# Altium PCB WalkMod B0.PcbDoc
Units mm, origin at the board's own origin, x right, y up, seen from the top; angles counter-clockwise.
Board outline 19.6 x 15.5 mm, 2 copper layers (Top Layer, Bottom Layer), stack 0.67 mm thick; 27 components, 25 nets, 90 pads, 39 vias.
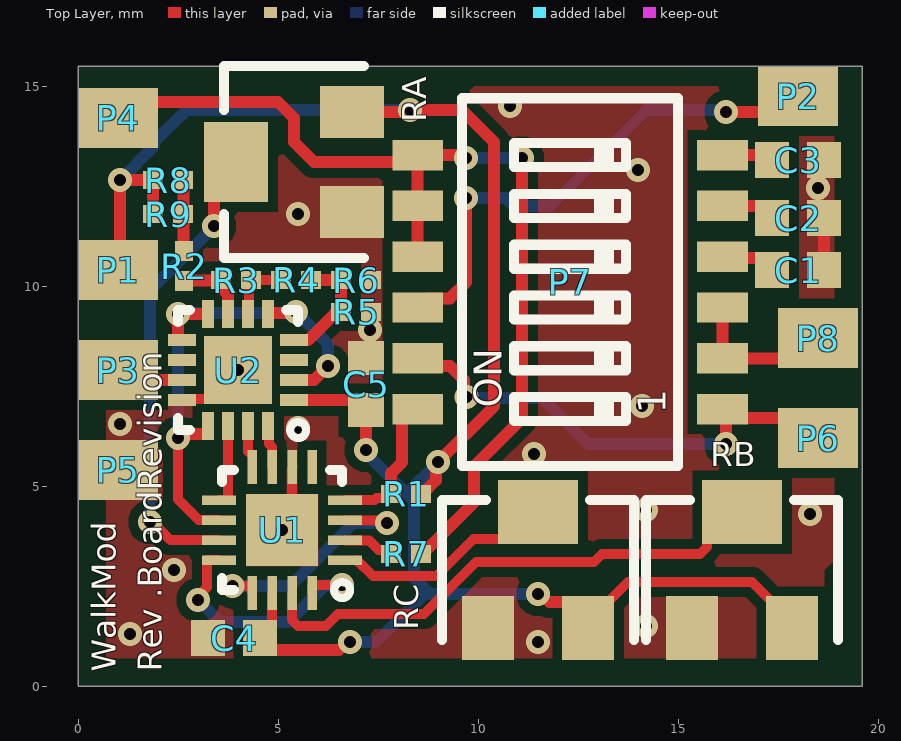
[diagram p0: Top Layer view]
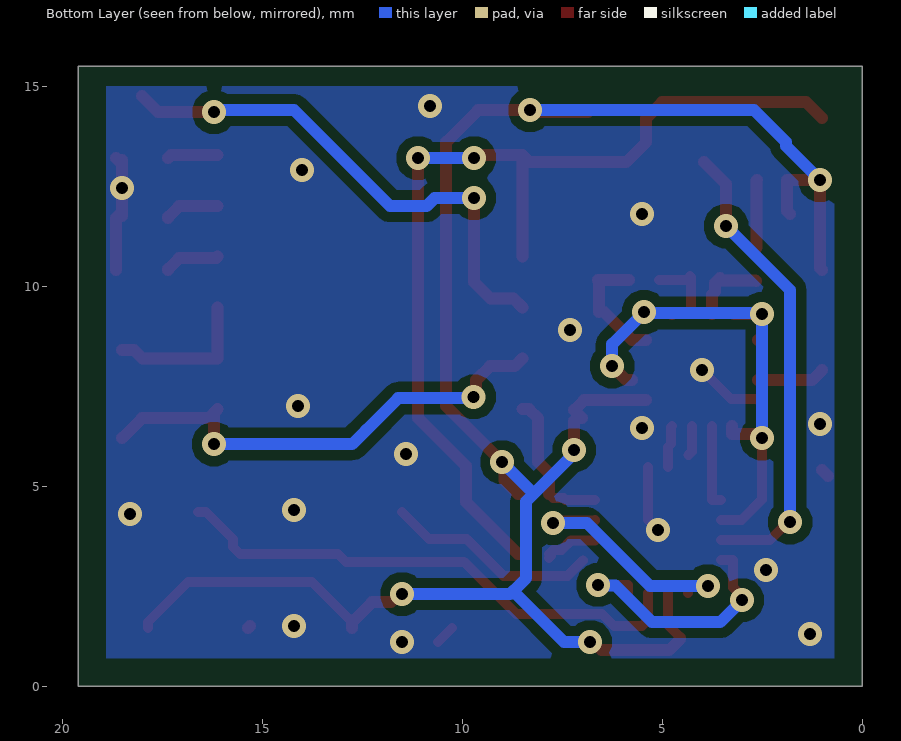
[diagram p1: Bottom Layer view, seen from below]

## Layer stack, top to bottom
Top Solder: solder mask 0.0254, SM-001, Dk 4
Top Layer: signal copper 0.035
Dielectric 1: core 0.6, Core-038, Dk 4.6
Bottom Layer: signal copper 0.035
Bottom Solder: solder mask 0.0254, SM-001, Dk 4

## Board outline
0,0 0,15.5 19.6,15.5 19.6,0

## Design rules (kind name [scope] priority, off if disabled: settings)
BoardOutlineClearance [All] p1 off: gap=0.7 ignorepadtopadclearanceinfootprint=FALSE
Clearance Polygon_Clearance [InPolygon] p1: gap=0.25 ignorepadtopadclearanceinfootprint=FALSE
Clearance QFN16_Clearance [IsPad and HasFootprint('QFN16_0.5_C') vs IsPad and HasFootprint('QFN16_0.5_C')] p2: gap=0.152 ignorepadtopadclearanceinfootprint=FALSE
Clearance [All] p3: gap=0.2 ignorepadtopadclearanceinfootprint=FALSE
Height [All] p1 off: minheight=0 maxheight=25.4 prefheight=12.7
HoleSize [All] p1: absolutevalues=TRUE maxlimit=0.3 minlimit=0.3 maxpercent=80.000 minpercent=20.000
HoleToHoleClearance [All] p1: gap=0.5 allowstackedmicrovias=TRUE
MinimumSolderMaskSliver [All] p1: minsoldermaskwidth=0.08
PolygonConnect [All] p1: connectstyle=Direct reliefconductorwidth=0.254 reliefentries=4 polygonreliefangle="90 Angle" airgapwidth=0.254
RoomDefinition "WalkMod B0" [InComponentClass('WalkMod B0')] p1 off: confinementstyle=ConfineIn formatcopy=TRUE lockcomponents=FALSE outline 0,0 19.6,0 19.6,15.5 0,15.5
RoutingVias [All] p1: holewidth=0.3 width=0.6 viastyle="Through Hole" minholewidth=0.3 minwidth=0.6 maxholewidth=0.3 maxwidth=0.6
SilkToSolderMaskClearance [IsPad] p1 off: minsilkscreentomaskgap=0.254 clearancetoexposedcopper=TRUE
SolderMaskExpansion [All] p1: expansion=0.055 istentingtop=FALSE
Width [All] p1: maxlimit=0.7 minlimit=0.25 preferedwidth=0.3
25 further rules are at their usual default settings.

## Components (designator, comment, footprint, x,y, rotation, side; value= is the part's Value field where it differs from the comment)
C1 "CL10B105KA8NFNC" CX7R0603K#1 18,10.4 r180 top value=1uF
C2 "CL10B474KO8NFNC" CX7R0603K#1 18,11.7 r180 top value=470nF
C3 "CC0603KRX7R6BB224" CX7R0603K#1 18,13.15 r180 top value=220nF
C4 "CL10B105KA8NFNC" CX7R0603K#2 3.9,1.2 r0 top value=1uF
C5 "CL10B105KA8NFNC" CX7R0603K#2 7.2,7.55 r270 top value=1uF
P1 "SMD Pad 1 pin" PAD_2X1.5_SQUARE 1,10.4 r0 top
P2 "SMD Pad 1 pin" PAD_2X1.5_SQUARE 18,14.75 r180 top
P3 "SMD Pad 1 pin" PAD_2X1.5_SQUARE 1,7.9 r0 top
P4 "SMD Pad 1 pin" PAD_2X1.5_SQUARE 1,14.2 r0 top
P5 "SMD Pad 1 pin" PAD_2X1.5_SQUARE 1,5.4 r180 top
P6 "SMD Pad 1 pin" PAD_2X1.5_SQUARE 18.5,6.2 r0 top
P7 "DS05-127-2-06BK-SMT-TR" CUI-DS05-127-2-06BK-SMT_C 12.3,10.1 r90 top
P8 "SMD Pad 1 pin" PAD_2X1.5_SQUARE 18.5,8.7 r0 top
R1 "DNP" AT0402_C 8.2,4.8 r180 top
R2 "RG1005P-472-B-T5" RT0402_C 2.65,10.5 r90 top value=4.7k
R3 "RG1005P-472-B-T5" RT0402_C 3.95,10.15 r180 top value=4.7k
R4 "RG1005P-472-B-T5" RT0402_C 5.45,10.15 r180 top value=4.7k
R5 "RG1005P-472-B-T5" RT0402_C 6.95,9.35 r180 top value=4.7k
R6 "RG1005P-472-B-T5" RT0402_C 6.95,10.15 r180 top value=4.7k
R7 "RG1005P-472-B-T5" RT0402_C 8.2,3.3 r180 top value=4.7k
R8 "RG1005P-472-B-T5" RT0402_C 2.25,12.65 r180 top value=4.7k
R9 "RG1005P-472-B-T5" RT0402_C 2.25,11.8 r180 top value=4.7k
RA "3214W-1-103E" BOURNS_3214W_C 5.4,13.1 r0 top value=10k
RB "3214W-1-103E" BOURNS_3214W_C 16.6,2.9 r270 top value=10k
RC "3214W-1-103E" BOURNS_3214W_C 11.5,2.9 r270 top value=10k
U1 "NX3L4053HR,115" HXQFN16_SOT1039-2_C 5.1,3.9 r180 top
U2 "LM339QT" QFN16_0.5_C 4,7.9 r180 top

## Footprints (in the part's own frame and the unit in brackets; to place one, negate y for a bottom-side part, rotate by r counter-clockwise, add the part's x,y. Pads: shape width x height; smd on the part's side, far side on the other; paste and mask are expansions set on the pad)
AT0402_C [mm] "Chip Resistor, 2-Leads, Body 1.00x0.50mm, IPC High Density"
  rect 0.5x0.45 smd: 1(-0.375,0) 2(0.375,0)
  body extent -0.53,-0.27 0.53,0.28, height 0.4
BOURNS_3214W_C [mm]
  rect 1.6x1.3 smd: 1(1.45,-1.25) 3(1.45,1.25)
  rect 1.6x2 smd: 2(-1.45,0)
  silkscreen extent -1.75,-2.4 1.75,2.4, body extent -1.98,-2.41 1.98,2.42, height 5.29
CUI-DS05-127-2-06BK-SMT_C [mm] "Dip Switch SPST 6 Position Surface Mount Slide (Standard) Actuator 25mA 24VDC"
  rect 0.76x1.27 smd: 1(-3.175,-3.81) 2(-3.175,3.81) 3(-1.905,-3.81) 4(-1.905,3.81) 6(-0.635,3.81) 8(0.635,3.81) 10(1.905,3.81) 12(3.175,3.81)
  rect 0.76x1.27 smd mask+0.102: 5(-0.635,-3.81) 7(0.635,-3.81) 9(1.905,-3.81) 11(3.175,-3.81)
  silkscreen extent -4.59,-2.7 4.59,2.7, body extent -4.59,-4.15 4.59,4.15, height 2.4
CX7R0603K#1 [mm] "Chip Capacitor, 2-Leads, Body 1.60x0.81mm, IPC High Density"
  rect 0.85x0.9 smd: 1(-0.65,0)
  rect 0.85x0.9 smd mask+0.102: 2(0.65,0)
  body extent -0.88,-0.48 0.87,0.48, height 1.02
CX7R0603K#2 [mm] "Chip Capacitor, 2-Leads, Body 1.60x0.81mm, IPC High Density"
  rect 0.85x0.9 smd: 1(-0.65,0) 2(0.65,0)
  body extent -0.88,-0.48 0.87,0.48, height 1.02
HXQFN16_SOT1039-2_C [mm] "HXQFN16 (U) plastic thermal enhanced extremely thin quad  flat package; no leads; 16 terminals, 0.5 mm pitch, 3 mm x 3  mm x 0.5 mm body"
  rect 0.85x0.24 smd paste-0.012: 1(-1.575,0.75) 2(-1.575,0.25) 3(-1.575,-0.25) 4(-1.575,-0.75) 9(1.575,-0.75) 10(1.575,-0.25) 11(1.575,0.25) 12(1.575,0.75)
  rect 0.24x0.85 smd paste-0.012: 5(-0.75,-1.575) 6(-0.25,-1.575) 7(0.25,-1.575) 8(0.75,-1.575) 13(0.75,1.575) 14(0.25,1.575) 15(-0.25,1.575) 16(-0.75,1.575)
  rect 1.8x1.8 smd paste-0.5: EP(0,0)
  silkscreen extent -1.7,-1.5 1.5,1.7, body extent -1.5,-1.5 1.5,1.5, height 0.5
PAD_2X1.5_SQUARE [mm]
  rect 2x1.5 smd paste-5: 1(0,0)
QFN16_0.5_C [mm]
  rect 0.7x0.3 smd: 1(-1.4,0.75) 2(-1.4,0.25) 3(-1.4,-0.25) 4(-1.4,-0.75) 9(1.4,-0.75) 10(1.4,-0.25) 11(1.4,0.25) 12(1.4,0.75)
  rect 0.3x0.7 smd: 5(-0.75,-1.4) 6(-0.25,-1.4) 7(0.25,-1.4) 8(0.75,-1.4) 13(0.75,1.4) 14(0.25,1.4) 15(-0.25,1.4) 16(-0.75,1.4)
  rect 1.7x1.7 smd: EP(0,0)
  silkscreen extent -1.7,-1.5 1.5,1.7, body extent -1.5,-1.5 1.5,1.5, height 1
RT0402_C [mm] "Chip Resistor, 2-Leads, Body 1.00x0.50mm, IPC High Density"
  rect 0.5x0.45 smd: 1(-0.375,0) 2(0.375,0)
  body extent -0.53,-0.27 0.53,0.28, height 0.4

## Part data
C1 C4 C5: library part kyocera-C-X7R-0603, "1 µF ±10% 25V Ceramic Capacitor X7R 0603 (1608 Metric)", Value2=25V, Size=0603, Type=CL10B105KA8NFNC
C2: library part kyocera-C-X7R-0603, "0.47 µF ±10% 16V Ceramic Capacitor X7R 0603 (1608 Metric)", Value2=16V, Size=0603, Type=CL10B474KO8NFNC
C3: library part kyocera-C-X7R-0603, "0.22 µF ±10% 10V Ceramic Capacitor X7R 0603 (1608 Metric)", Value2=10V, Size=0603, Type=CC0603KRX7R6BB224
P1 P2 P3 P4 P5 P6 P8: "Single SMD Pad"
  P1: Name=3.3V
  P2: Name="Replacement Button"
  P3: Name="Axis In"
  P4: Name="Axis Out"
  P5: Name=GND
  P6: Name="Button In"
  P8: Name="Button Out"
P7: "Dip Switch SPST 6 Position Surface Mount Slide (Standard) Actuator 25mA 24VDC", Type=DS05-127-2-06BK-SMT-TR
R1: library part AT0402FRE0710KL, "10 kOhms ±1% 0.063W, 1/16W Chip Resistor 0402 (1005 Metric) Anti-Sulfur, Automotive AEC-Q200, Moisture Resistant Thin Film", Value2=62.5mW, Type=DNP
R2 R3 R4 R5 R6 R7 R8 R9: library part RT0402DRD0747KL, "4.7 kOhms ±0.1% 0.063W, 1/16W Chip Resistor 0402 (1005 Metric) Anti-Sulfur, Automotive AEC-Q200 Thin Film", Value2=62.5mW, Type=RG1005P-472-B-T5
RA RB RC: "10 kOhms 0.25W, 1/4W J Lead Surface Mount Trimmer Potentiometer Cermet 5.0 Turn Top Adjustment", Value2=250mW, Type=3214W-1-103E
U1: library part NX3L4053, "3 Circuit IC Switch 2:1 800mOhm 16-HXQFN (3x3)", Manufacturer Part Number 1="NXP USA Inc.", Manufacturer 1=NX3L4053HR,115, Type=NX3L4053HR,115
U2: "Comparator General Purpose CMOS, DTL, ECL, MOS, Open-Collector, TTL 16-QFN (3x3)", Manufacturer 1=STMicroelectronics, Manufacturer Part Number 1=LM339QT, Type=LM339QT

## Via types
v1: diameter 0.6, hole 0.3, Top Layer to Bottom Layer, 39 vias

## Nets (pads, with @x,y where several pads share a name; then routed paths per layer and width w, separated by ;. In a path a pad name is that pad's centre, name@x,y a point inside that pad or via, vN(x,y) a via of type N, cw(c..) or ccw(c..) an arc to the next point about the centre after c; other vN are vias at no path point)
1S: U1.9 U2.14 | length 2.1
  Top Layer w0.25: U1.9 3.53,4.655 3.75,4.655 U2.14
2S: U1.8 U2.15 | length 0.8
  Top Layer w0.25: U2.15 4.25,5.87 U1.8@4.345,5.775
3S: U1.7 U2.16 | length 1.1
  Top Layer w0.25: U2.16 4.775,6.475 4.775,6.052 4.85,5.977 U1.7
+3.3V: C4.2 C5.2 P1.1 R1.1 R8.2 R9.2 RA.3 RB.3 RC.3 U1.14 U2.1 | length 50
  Top Layer w0.25: C4.2 4.55,1.225 4.85,1.525 U1.14 ; RC.3@12.75,1.6 13.75,2.6 16.85,2.6 17.85,1.6 RB.3
  Top Layer w0.3: P1.1 1.05,10.45 v1(1.05,12.65) ; v1@1.05,12.7 v1(1.05,12.65) ; R9.2@1.8,11.8 1.875,11.875 R8.2 v1(1.05,12.65) ; C4.2 4.55,1.175 4.825,0.9 6.519,0.9 ; U2.1 6.95,7.15 C5.2 7,6.7 7.125,6.7 7.2,6.625 v1(7.2,5.9) ; RA.3 8.25,14.35 v1(8.3,14.4) 9.6,14.4 10.4,13.6 10.4,7 8.943,5.543 8.943,5.143 8.6,4.8 R1.1 ; 11.781,2.1 12.25,2.1 12.75,1.6 RC.3
  Bottom Layer w0.3: v1(1.05,12.65) 1.904,13.504 1.904,13.604 2.7,14.4 v1(8.3,14.4) ; v1(6.8,1.1) 7.45,1.1 8.725,2.375 ; v1(7.2,5.9) 7.2,5.819 8.4,4.619 8.4,2.7 8.725,2.375 ; 8.209,4.809 v1(9,5.6) ; v1(11.5,2.3) 8.8,2.3 8.725,2.375
A: RA.2 U1.11 | length 11.8
  Top Layer w0.25: v1(1.8,4.1) 1.855,4.1 2.305,3.65 U1.11
  Top Layer w0.3: v1(3.4,11.5) 3.4,12.55 RA.2
  Bottom Layer w0.3: v1(1.8,4.1) 1.8,9.9 v1(3.4,11.5)
A\C\T\I\V\A\T\E\: P7.2 R1.2 U1.4 | length 3.7
  Top Layer w0.25: U1.4 7.416,4.65 7.466,4.7 7.725,4.7 R1.2
  Top Layer w0.3: R1.2 7.825,5.325 8.1,5.6 8.1,6.695 8.33,6.925 P7.2
ALT_BTN: P2.1 P7.6 | length 13.1
  Top Layer w0.3: P7.6 8.72,9.695 9.295,9.695 9.7,10.1 v1(9.7,12.2) ; v1(16.2,14.35) 17.6,14.35 P2.1
  Bottom Layer w0.3: v1(9.7,12.2) 10.691,12.2 10.891,12 11.8,12 14.2,14.4 v1@16.2,14.4
B: RB.2 U1.15 | length 13.3
  Top Layer w0.25: U1.15 5.35,1.65 5.5,1.5 6.2,1.5 6.5,1.8 8.646,1.8 9.946,3.1 12.9,3.1 13.1,3.3 15.55,3.3 15.725,3.475 15.725,3.675 16.4,4.35 RB.2
BTN_IN: P6.1 P7.1 P7.4 | length 12.3
  Top Layer w0.3: P7.4 8.685,8 9.3,8 9.653,7.647 9.653,7.347 v1@9.7,7.3 ; v1@9.67,7.27 v1(9.71,7.23) ; P7.1 P7.1@16.2,6.835 ; v1(16.2,6.05) P7.1@16.2,6.835 ; P6.1 18,6.7 16.335,6.7 P7.1@16.2,6.835
  Bottom Layer w0.3: v1(9.71,7.23) 9.74,7.2 11.6,7.2 12.4,6.4 12.75,6.05 v1(16.2,6.05)
BTN_OUT: P7.3 P7.5 P8.1 | length 3.7
  Top Layer w0.3: P7.5 P7.3 17.995,8.195 18.2,8.4 P8.1@18.5,8.4
C: RC.2 U1.1 | length 5.4
  Top Layer w0.25: U1.1@6.975,3.145 7.37,2.75 8.96,2.75 9.885,3.675 10.825,3.675 RC.2
GND: C1.1 C2.1 C3.1 C4.1 C5.1 P5.1 R5.1 R6.1 RA.1 RB.1 RC.1 U1.6 U1.EP U2.12 U2.EP | length 7
  Top Layer w0.25: U2.12 2.625,7.175 2.965,7.175 3.275,7.175 v1(4,7.9) ; v1(5.1,3.9) 5.35,4.15 U1.6 U1.6@5.355,5.48 ; RC.1 RC.1@10.6,1.1
  Top Layer w0.3: P5.1@0.85,5.25 P5.1 ; RB.1@15.3,1.5 RB.1 ; C2.1@18.5,11.75 v1(18.5,12.45) C3.1@18.5,13.15 ; C2.1@18.6,11.75 C2.1 C1.1 ; C3.1@18.6,13.15 C3.1@18.65,13.2
  other v1: 11.5,1.1 1.3,1.3 14.2,1.5 2.4,2.9 18.3,4.3 14.2,4.4 11.4,5.8 5.5,6.45 1.05,6.55 14.1,7 7.3,8.9 5.5,11.8 14,12.9 10.8,14.5
IN: P3.1 U2.11 | length 1.7
  Top Layer w0.3: P3.1 1.25,7.65 U2.11
IN_BUF: U1.10 U2.2 U2.5 U2.8 U2.9 U2.13 | length 14.3
  Top Layer w0.25: v1(2.5,6.2) 2.5,4.67 3.015,4.155 3.52,4.155 U1.10
  Top Layer w0.3: v1(2.5,6.2) 2.581,6.2 2.681,6.3 3.25,6.3 U2.13 ; U2.9 2.5,8.65 v1(2.5,9.3) U2.8@3.2,9.3 ; U2.5 4.75,9.325 5.425,9.325 v1(5.45,9.35) ; U2.2@5.75,7.65 5.895,7.65 6.245,8 v1(6.25,8)
  Bottom Layer w0.3: v1(2.5,6.2) v1(2.5,9.3) 2.525,9.325 5.375,9.325 v1@5.4,9.35 ; v1(5.45,9.35) 6.25,8.55 v1(6.25,8)
NetC1_2: C1.2 P7.7 | length 1.4
  Top Layer w0.3: P7.7 16.145,10.7 17.075,10.7 17.35,10.425 C1.2
NetC2_2: C2.2 P7.9 | length 1.4
  Top Layer w0.3: P7.9 16.115,12 17.075,12 17.35,11.725 C2.2
NetC3_2: C3.2 P7.11 | length 1.3
  Top Layer w0.3: P7.11 17.275,13.275 C3.2@17.35,13.2
NetR2_2: R2.2 R8.1 R9.1 | length 1.8
  Top Layer w0.3: R8.1 2.638,12.638 2.638,10.963 R2.2@2.7,10.9
NetU1_3: U1.3 U1.13 | length 6.3
  Top Layer w0.25: v1(3.855,2.5) 4.345,2.5 4.35,2.495 U1.13 ; U1.3 6.68,4.145 7.335,4.145 7.338,4.142 7.658,4.142 v1(7.725,4.075)
  Bottom Layer w0.3: v1(3.855,2.5) 5.3,2.5 6.875,4.075 v1(7.725,4.075)
NetU1_12: U1.12 U1.16 | length 6.6
  Top Layer w0.25: v1(3,2.15) 3,2.245 3.225,2.47 3.225,3.145 3.23,3.15 U1.12 ; U1.16 5.85,2.523 5.855,2.528 v1(6.602,2.528)
  Bottom Layer w0.3: v1(3,2.15) 3.55,1.6 5.25,1.6 6.16,2.51 6.583,2.51 v1(6.602,2.528)
OUT: R7.2 U1.2 | length 1.4
  Top Layer w0.25: U1.2 6.68,3.645 7.271,3.645 7.516,3.4 7.725,3.4 R7.2 ; R7.2@7.775,3.25 R7.2@7.825,3.2
OUT_FLT: P4.1 P7.8 P7.10 P7.12 R7.1 | length 24.8
  Top Layer w0.3: P4.1 1.4,14.6 5,14.6 5.4,14.2 5.4,13.6 5.9,13.1 8.315,13.1 P7.12 ; P7.8 P7.10 P7.12 ; R7.1 8.6,3.3 9.9,4.6 9.9,5.5 11.1,6.7 v1(11.1,13.2) ; v1(9.7,13.2) 9.625,13.275 P7.12
  Bottom Layer w0.3: v1(9.7,13.2) v1(11.1,13.2)
VT_A: R2.1 R3.2 U2.7 | length 1.8
  Top Layer w0.3: R2.1 2.662,10.137 3.487,10.137 R3.2@3.55,10.2 ; R3.2@3.6,10.15 3.675,10.075 3.675,9.87 3.725,9.82 3.75,9.795 3.75,9.755 U2.7
VT_B: R3.1 R4.2 U2.6 | length 1.8
  Top Layer w0.25: U2.6 4.275,9.325 R3.1@4.275,10.175 ; R3.1@4.3,10.25 4.275,10.225 R3.1@4.275,10.175 ; R4.2 R3.1 4.3,10.15 R3.1@4.275,10.175
VT_C: R4.1 R5.2 R6.2 U2.4 | length 2.9
  Top Layer w0.3: U2.4 5.75,8.65 R5.2@6.45,9.35 ; R4.1 R6.2@6.55,10.15 ; R5.2 6.575,10.125 R6.2@6.6,10.15
pads on no net: U1.5 U2.3 U2.10

## Polygon pours and split planes (outlines as drawn)
GND on Bottom Layer "GND_L02_P000" (solid, remove dead copper, pour order 0): 0.7,15 0.7,0.7 18.9,0.7 18.9,15
GND on Top Layer "GND_L01_P001" (solid, remove dead copper, pour order 1): 9.9,15 9.65,14.75 0.7,14.75 0.7,0.7 18.65,0.7 18.65,2.9 18.9,3.15 18.9,15

## Silkscreen, mask and mechanical layers (free items; w line width, h text height)
Top Overlay:
  text "WalkMod" at 0.946,0.354 h0.6 r90
  text "Rev .BoardRevision" at 2.096,0.354 h0.6 r90
Board Shape:
  lines w0.2: 0,0 19.5,0 19.5,15.5 0,15.5 0,0
Margin:
  lines w0.2: 0.7,0.7 0.7,15 18.7,15 18.9,14.8 18.9,0.7 0.7,0.7
Board:
  drawing of 243 lines, arcs and shapes, not listed
  text "Layer" at 36.097,16.287 h1
  text "Name" at 43.104,16.287 h1
  text "Material" at 65.439,16.287 h1
  text "Thickness" at 75.611,16.287 h1
  text "Constant" at 86.616,16.287 h1
  text "Board Layer Stack" at 96.289,16.287 h1
  text "Top Overlay" at 43.104,14.287 h1
  text "Top Solder" at 43.104,12.287 h1
  text "SM-001" at 65.439,12.287 h1
  text "0.025mm" at 75.611,12.287 h1
  text "4" at 86.616,12.287 h1
  text "Top Surface Finish" at 43.104,10.287 h1
  text "PbSn" at 65.439,10.287 h1
  text "0.020mm" at 75.611,10.287 h1
  text "1" at 36.097,8.287 h1
  text "Top Layer" at 43.104,8.287 h1
  text "CF-004" at 65.439,8.287 h1
  text "0.035mm" at 75.611,8.287 h1
  text "Dielectric 1" at 43.104,6.287 h1
  text "Core-038" at 65.439,6.287 h1
  text "0.600mm" at 75.611,6.287 h1
  text "4.6" at 86.616,6.287 h1
  text "2" at 36.097,4.287 h1
  text "Bottom Layer" at 43.104,4.287 h1
  text "CF-004" at 65.439,4.287 h1
  text "0.035mm" at 75.611,4.287 h1
  text "Bottom Surface Finish" at 43.104,2.287 h1
  text "PbSn" at 65.439,2.287 h1
  text "0.020mm" at 75.611,2.287 h1
  text "Bottom Solder" at 43.104,0.287 h1
  text "SM-001" at 65.439,0.287 h1
  text "0.025mm" at 75.611,0.287 h1
  text "4" at 86.616,0.287 h1
  text "Bottom Overlay" at 43.104,-1.713 h1
  text "Total board thickness:" at 36.097,-3.713 h1
  text "0.761mm" at 75.611,-3.713 h1
Drill Drawing:
  lines w0.254: -2.709,22.5 -1.598,22.5 -1.598,23.611 -2.709,23.611 -2.709,22.5
  lines w0.381: -3.733,21.75 113.97,21.75 ; -3.733,24.25 113.97,24.25 ; 5.728,19.25 5.728,26.75 ; 14.9,19.25 14.9,26.75 ; 32.903,19.25 32.903,26.75 ; 41.614,19.25 41.614,26.75 ; 54.123,19.25 54.123,26.75 ; 79.29,19.25 79.29,26.75 ; 89.401,19.25 89.401,26.75 ; 102.11,19.25 102.11,26.75 ; -3.733,19.25 113.97,19.25 113.97,26.75 -3.733,26.75 -3.733,19.25
  text "Symbol" at -2.233,25 h1.2
  text "Count" at 6.478,25 h1.2
  text "Hole Size" at 15.65,25 h1.2
  text "Plated" at 33.653,25 h1.2
  text "Hole Type" at 42.364,25 h1.2
  text "Drill Layer Pair" at 54.873,25 h1.2
  text "Via/Pad" at 80.04,25 h1.2
  text "Pad Shape" at 90.151,25 h1.2
  text "Template" at 102.86,25 h1.2
  text "39" at 6.478,22.5 h1
  text "0.300mm (11.81mil)" at 15.65,22.5 h1
  text "PTH" at 33.653,22.5 h1
  text "Round" at 42.364,22.5 h1
  text "Top Layer - Bottom Layer" at 54.873,22.5 h1
  text "Via" at 80.04,22.5 h1
  text "Rounded" at 90.151,22.5 h1
  text "v60h30" at 102.86,22.5 h1
  text "39 Total" at 6.478,20 h1
Switches - Enable:
  rectangle: 13,9.16 13.5,9.76
  region: 11.6,8.49 11.1,8.49 11.1,7.89 11.6,7.89
  rectangle: 13,6.62 13.5,7.22
  lines w0.2: 9.6,5.5 9.6,14.7 15,14.7 15,5.5 9.6,5.5 ; 10.9,6.62 13.7,6.62 13.7,7.22 10.9,7.22 10.9,6.62 ; 10.9,7.89 13.7,7.89 13.7,8.49 10.9,8.49 10.9,7.89 ; 10.9,9.16 10.9,9.76 13.7,9.76 13.7,9.16 10.9,9.16
Switches - Disable:
  region: 11.6,9.76 11.1,9.76 11.1,9.16 11.6,9.16
  rectangle: 13,7.89 13.5,8.49
  region: 11.6,7.22 11.1,7.22 11.1,6.62 11.6,6.62
  lines w0.2: 9.6,5.5 9.6,14.7 15,14.7 15,5.5 9.6,5.5 ; 10.9,6.62 13.7,6.62 13.7,7.22 10.9,7.22 10.9,6.62 ; 10.9,7.89 13.7,7.89 13.7,8.49 10.9,8.49 10.9,7.89 ; 10.9,9.16 13.7,9.16 13.7,9.76 10.9,9.76 10.9,9.16
Switches - No Filter:
  rectangle: 13,12.97 13.5,13.57
  rectangle: 13,11.7 13.5,12.3
  rectangle: 13,10.43 13.5,11.03
  lines w0.2: 9.6,5.5 9.6,14.7 15,14.7 15,5.5 9.6,5.5 ; 10.9,10.43 13.7,10.43 13.7,11.03 10.9,11.03 10.9,10.43 ; 10.9,11.7 13.7,11.7 13.7,12.3 10.9,12.3 10.9,11.7 ; 10.9,12.97 13.7,12.97 13.7,13.57 10.9,13.57 10.9,12.97
Switches - Filter 1:
  rectangle: 13,12.97 13.5,13.57
  rectangle: 13,11.7 13.5,12.3
  region: 11.6,11.03 11.1,11.03 11.1,10.43 11.6,10.43
  lines w0.2: 9.6,5.5 15,5.5 15,14.7 9.6,14.7 9.6,5.5 ; 10.9,10.43 13.7,10.43 13.7,11.03 10.9,11.03 10.9,10.43 ; 10.9,11.7 13.7,11.7 13.7,12.3 10.9,12.3 10.9,11.7 ; 10.9,12.97 13.7,12.97 13.7,13.57 10.9,13.57 10.9,12.97
Switches - Filter 2:
  rectangle: 13,12.97 13.5,13.57
  region: 11.6,12.3 11.1,12.3 11.1,11.7 11.6,11.7
  rectangle: 13,10.43 13.5,11.03
  lines w0.2: 9.6,5.5 9.6,14.7 15,14.7 15,5.5 9.6,5.5 ; 10.9,10.43 10.9,11.03 13.7,11.03 13.7,10.43 10.9,10.43 ; 10.9,11.7 10.9,12.3 13.7,12.3 13.7,11.7 10.9,11.7 ; 10.9,12.97 10.9,13.57 13.7,13.57 13.7,12.97 10.9,12.97
Switches - Filter 3:
  rectangle: 13,12.97 13.5,13.57
  region: 11.6,12.3 11.1,12.3 11.1,11.7 11.6,11.7
  region: 11.6,11.03 11.1,11.03 11.1,10.43 11.6,10.43
  lines w0.2: 9.6,5.5 9.6,14.7 15,14.7 15,5.5 9.6,5.5 ; 10.9,10.43 10.9,11.03 13.7,11.03 13.7,10.43 10.9,10.43 ; 10.9,11.7 10.9,12.3 13.7,12.3 13.7,11.7 10.9,11.7 ; 10.9,12.97 10.9,13.57 13.7,13.57 13.7,12.97 10.9,12.97
Switches - Filter 4:
  region: 11.6,13.57 11.1,13.57 11.1,12.97 11.6,12.97
  rectangle: 13,11.7 13.5,12.3
  rectangle: 13,10.43 13.5,11.03
  lines w0.2: 9.6,5.5 9.6,14.7 15,14.7 15,5.5 9.6,5.5 ; 10.9,10.43 10.9,11.03 13.7,11.03 13.7,10.43 10.9,10.43 ; 10.9,11.7 10.9,12.3 13.7,12.3 13.7,11.7 10.9,11.7 ; 10.9,12.97 10.9,13.57 13.7,13.57 13.7,12.97 10.9,12.97
Switches - Filter 5:
  region: 11.6,13.57 11.1,13.57 11.1,12.97 11.6,12.97
  rectangle: 13,11.7 13.5,12.3
  region: 11.6,11.03 11.1,11.03 11.1,10.43 11.6,10.43
  lines w0.2: 9.6,5.5 9.6,14.7 15,14.7 15,5.5 9.6,5.5 ; 10.9,10.43 10.9,11.03 13.7,11.03 13.7,10.43 10.9,10.43 ; 10.9,11.7 10.9,12.3 13.7,12.3 13.7,11.7 10.9,11.7 ; 10.9,12.97 10.9,13.57 13.7,13.57 13.7,12.97 10.9,12.97
Switches - Filter 6:
  region: 11.6,13.57 11.1,13.57 11.1,12.97 11.6,12.97
  region: 11.6,12.3 11.1,12.3 11.1,11.7 11.6,11.7
  rectangle: 13,10.43 13.5,11.03
  lines w0.2: 9.6,5.5 9.6,14.7 15,14.7 15,5.5 9.6,5.5 ; 10.9,10.43 10.9,11.03 13.7,11.03 13.7,10.43 10.9,10.43 ; 10.9,11.7 10.9,12.3 13.7,12.3 13.7,11.7 10.9,11.7 ; 10.9,12.97 10.9,13.57 13.7,13.57 13.7,12.97 10.9,12.97
Switches - Filter 7:
  region: 11.6,13.57 11.1,13.57 11.1,12.97 11.6,12.97
  region: 11.6,12.3 11.1,12.3 11.1,11.7 11.6,11.7
  region: 11.6,11.03 11.1,11.03 11.1,10.43 11.6,10.43
  lines w0.2: 9.6,5.5 9.6,14.7 15,14.7 15,5.5 9.6,5.5 ; 10.9,10.43 10.9,11.03 13.7,11.03 13.7,10.43 10.9,10.43 ; 10.9,11.7 10.9,12.3 13.7,12.3 13.7,11.7 10.9,11.7 ; 10.9,12.97 10.9,13.57 13.7,13.57 13.7,12.97 10.9,12.97
Potentiometers:
  circle w0.2: c18,3.65 r0.602
  circle w0.2: c12.9,3.65 r0.602
  circle w0.2: c4.65,14.5 r0.602
  lines w0.2: 4.05,14.5 5.25,14.5 ; 12.9,3.05 12.9,4.25 ; 18,3.05 18,4.25 ; 3.65,10.7 7.15,10.7 7.15,15.5 3.65,15.5 3.65,10.7 ; 9.1,1.15 9.1,4.65 13.9,4.65 13.9,1.15 9.1,1.15 ; 14.2,1.15 14.2,4.65 19,4.65 19,1.15 14.2,1.15
Pads:
  rectangle: 17.5,5.45 19.5,6.95
  rectangle: 17.5,7.95 19.5,9.45
  rectangle: 17,14 19,15.5
  rectangle: 0,4.65 2,6.15
  rectangle: 0,7.15 2,8.65
  rectangle: 0,9.65 2,11.15
  rectangle: 0,13.45 2,14.95

## Dimensions
19.5,0 to 19.5,15.5 on Dimensions
0,0 to 19.5,0 on Dimensions

## Text inside footprints (layer, text, board x,y; h text height)
P7: Top Overlay "1" at 14.696,6.804 h0.7 r90; Top Overlay "ON" at 10.596,6.954 h0.7 r90; Top Assembly "1" at 14.7,6.8 h0.7 r90; Top Assembly "ON" at 10.6,6.9 h0.7 r90